# Altium PCB POGO-headers.PcbDoc
Units mil, origin at the board's own origin, x right, y up, seen from the top; angles counter-clockwise.
Board outline 2179.49 x 1970 mil, 4 copper layers (Top Layer, Mid-Layer 1, Mid-Layer 2, Bottom Layer); 5 components, 38 nets, 80 pads, 37 vias.
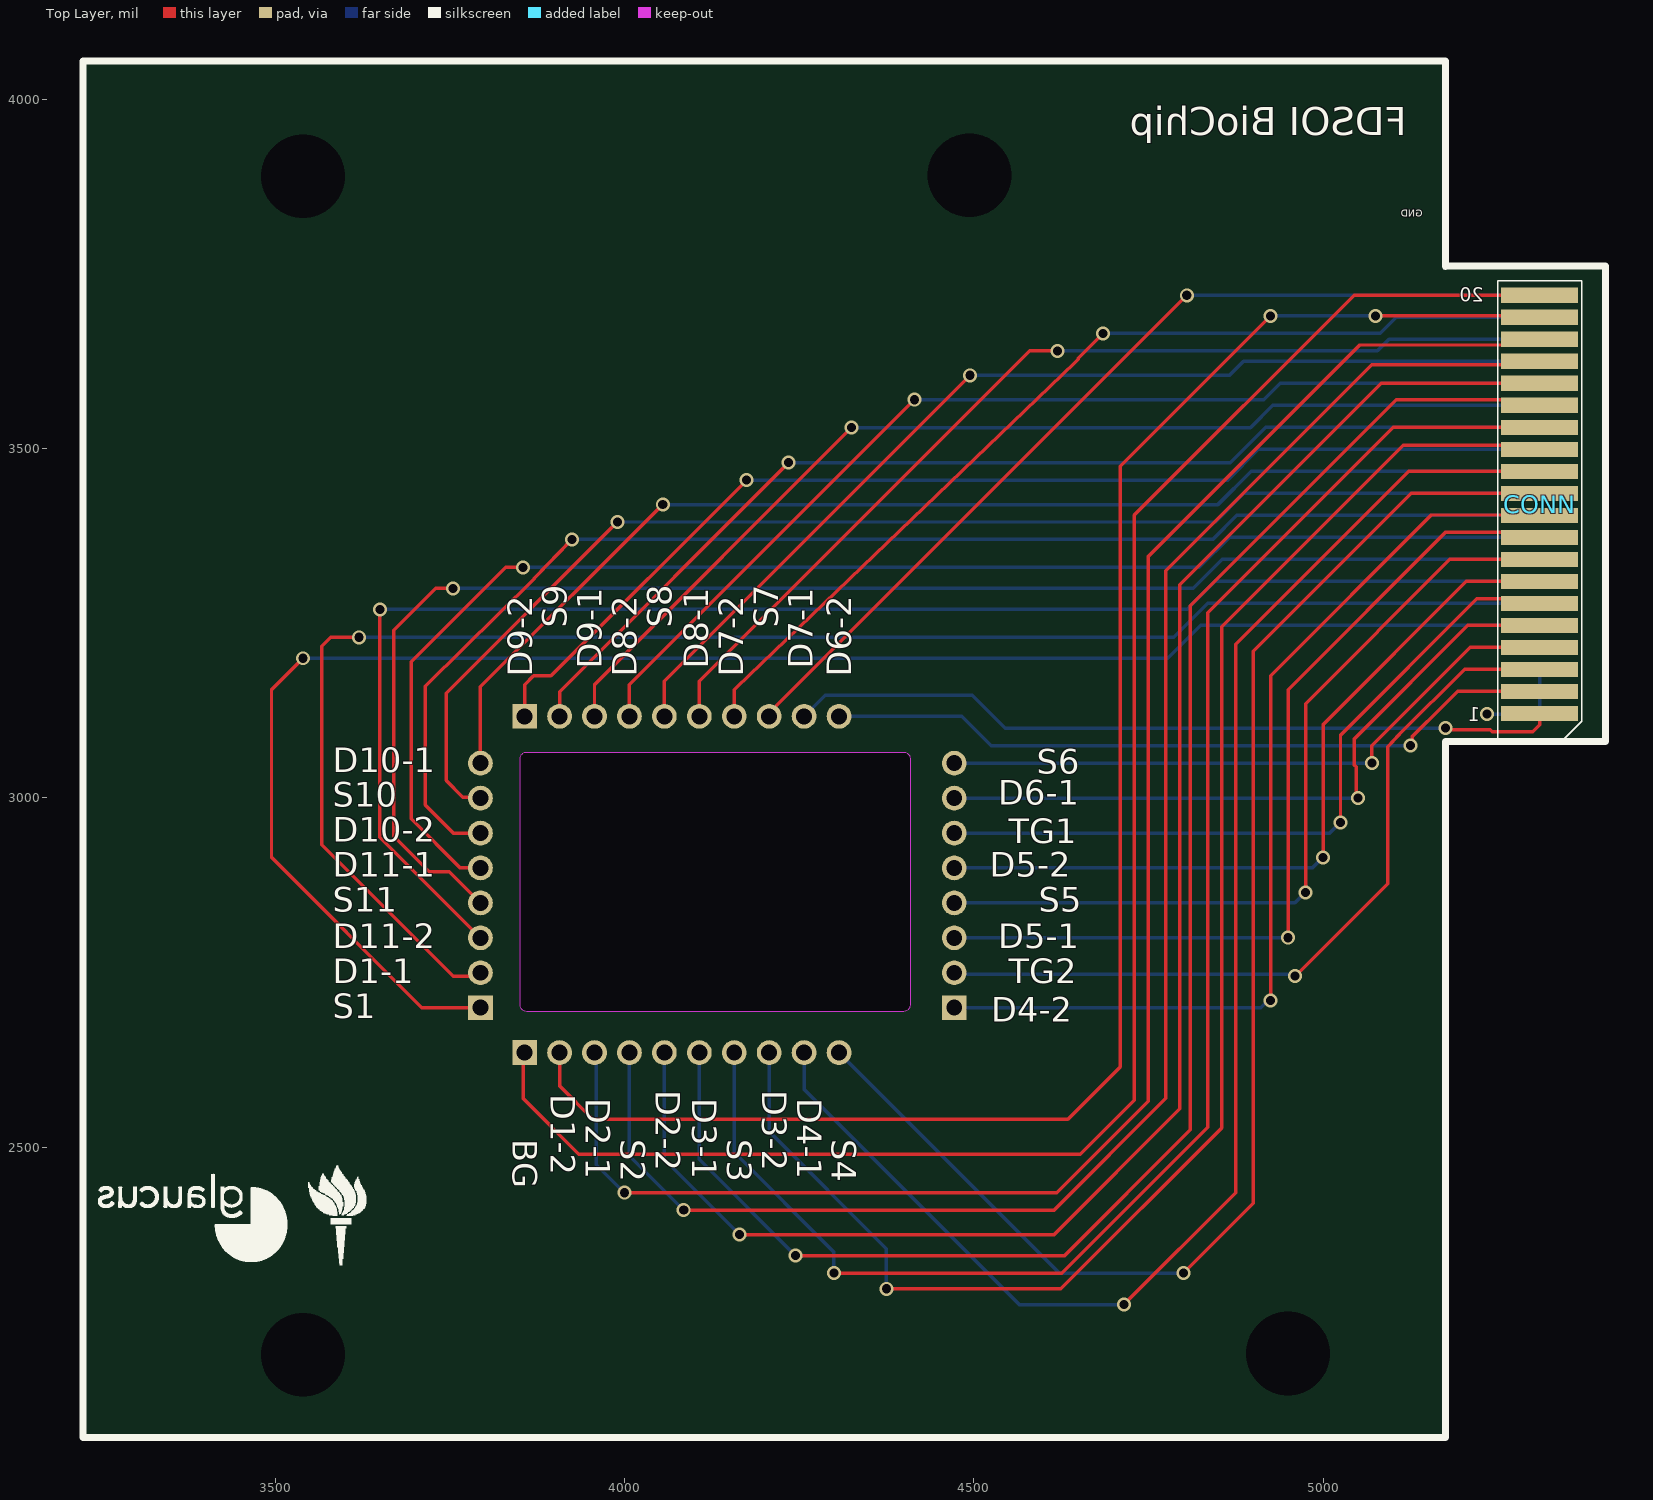
[diagram p0: Top Layer view]
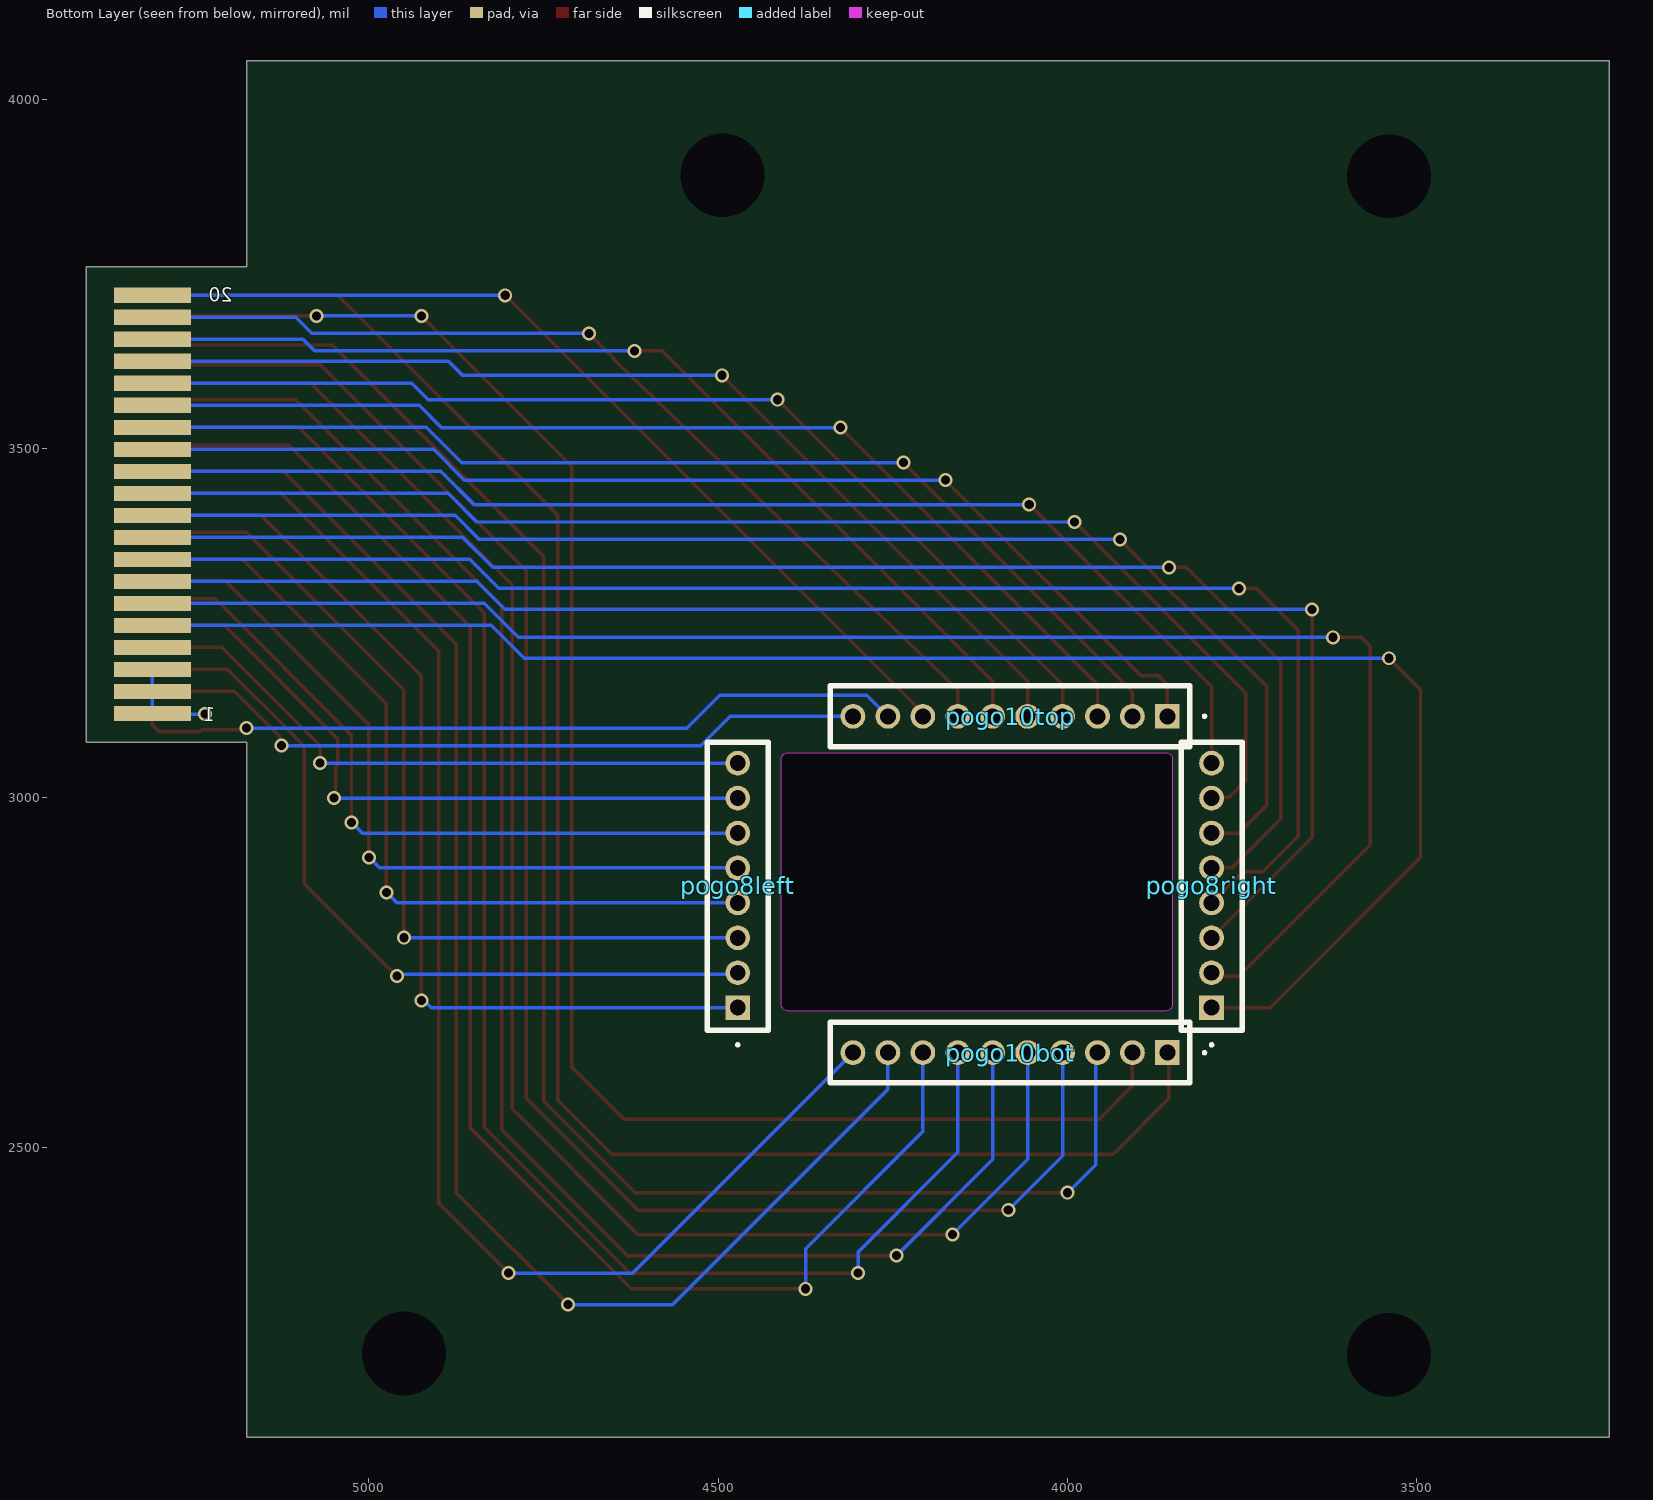
[diagram p1: Bottom Layer view, seen from below]
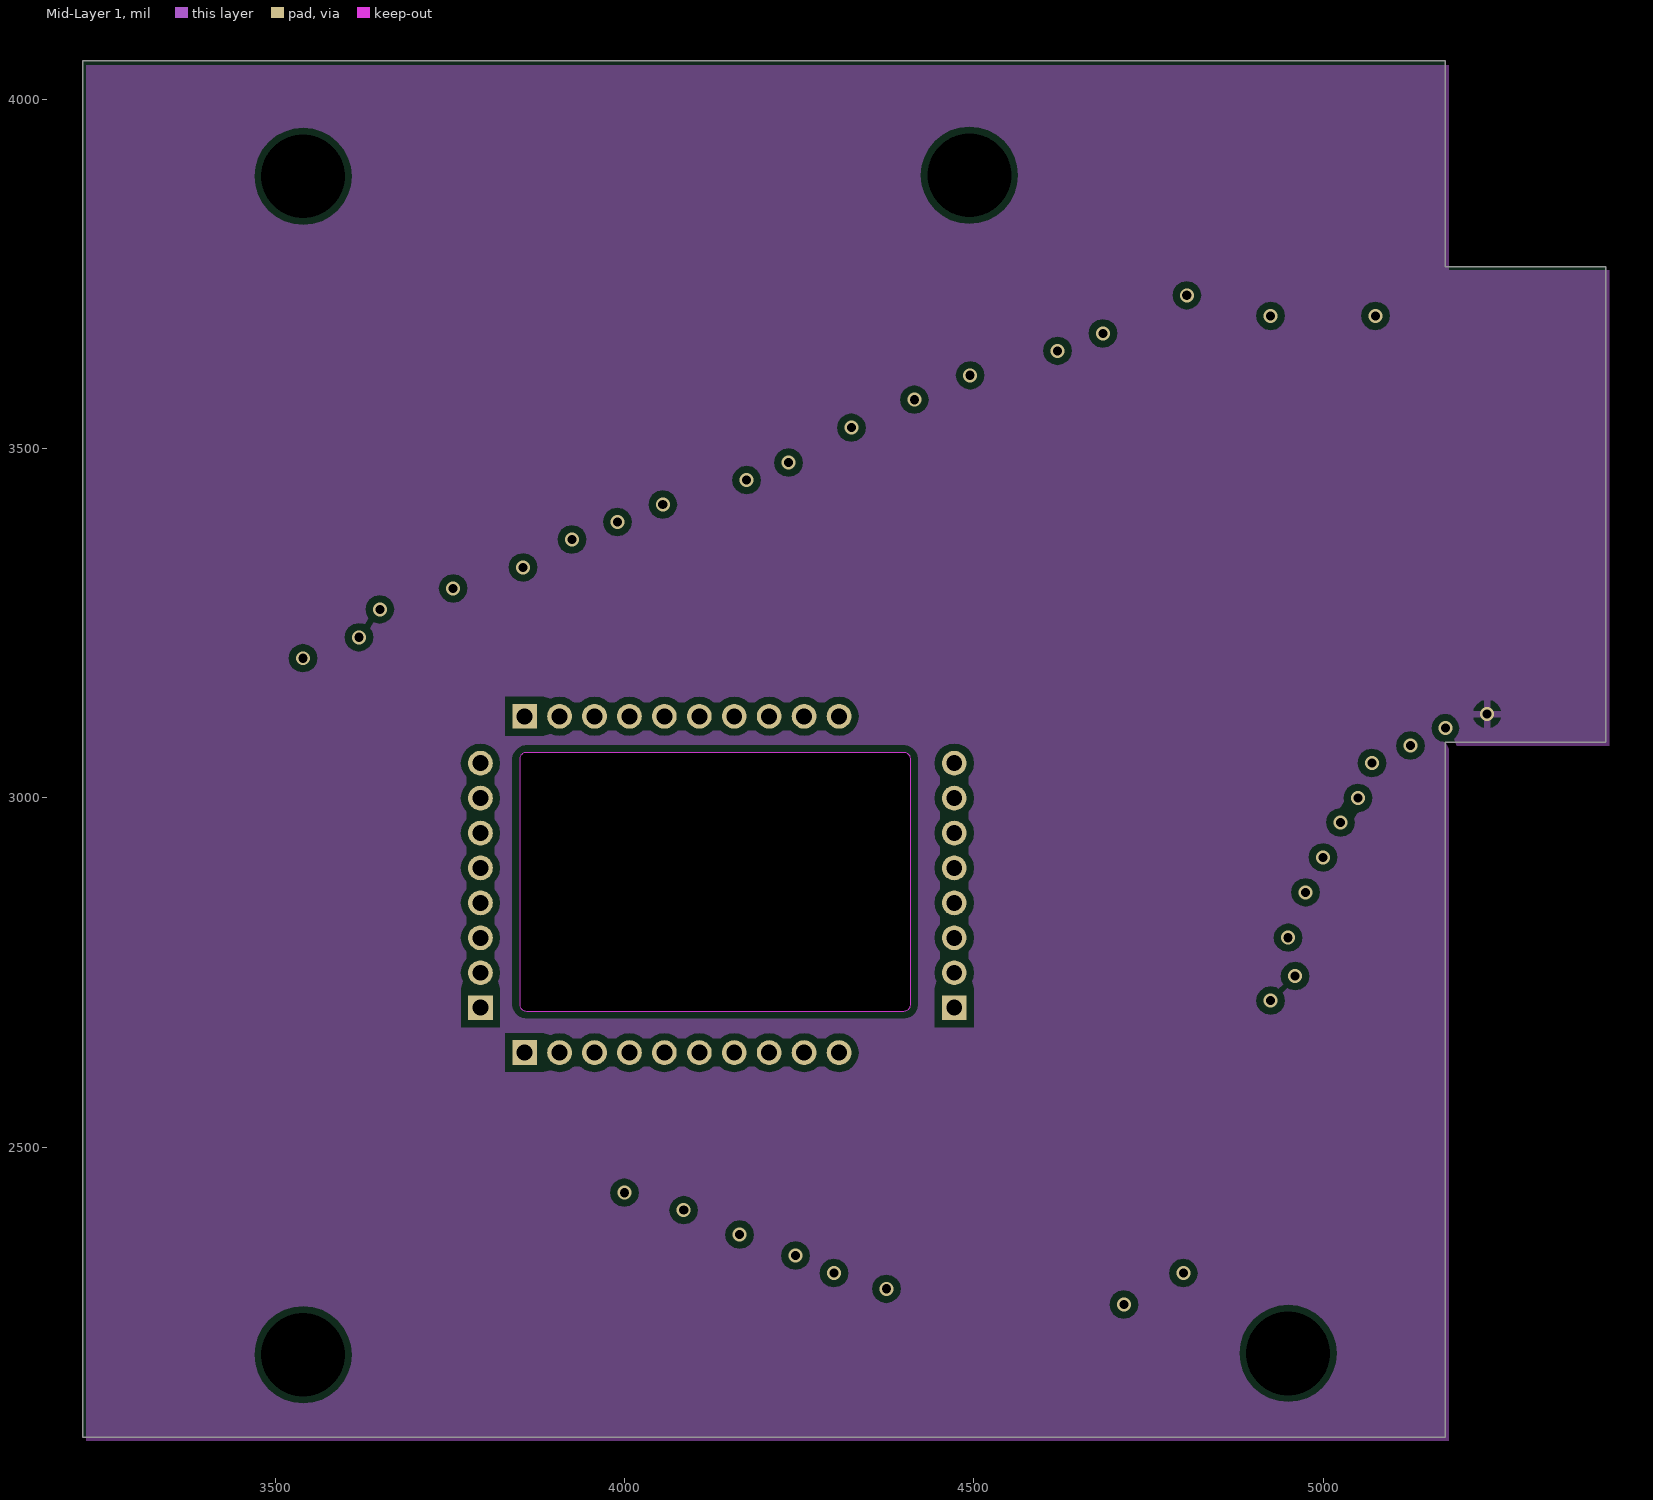
[diagram p2: Mid-Layer 1]
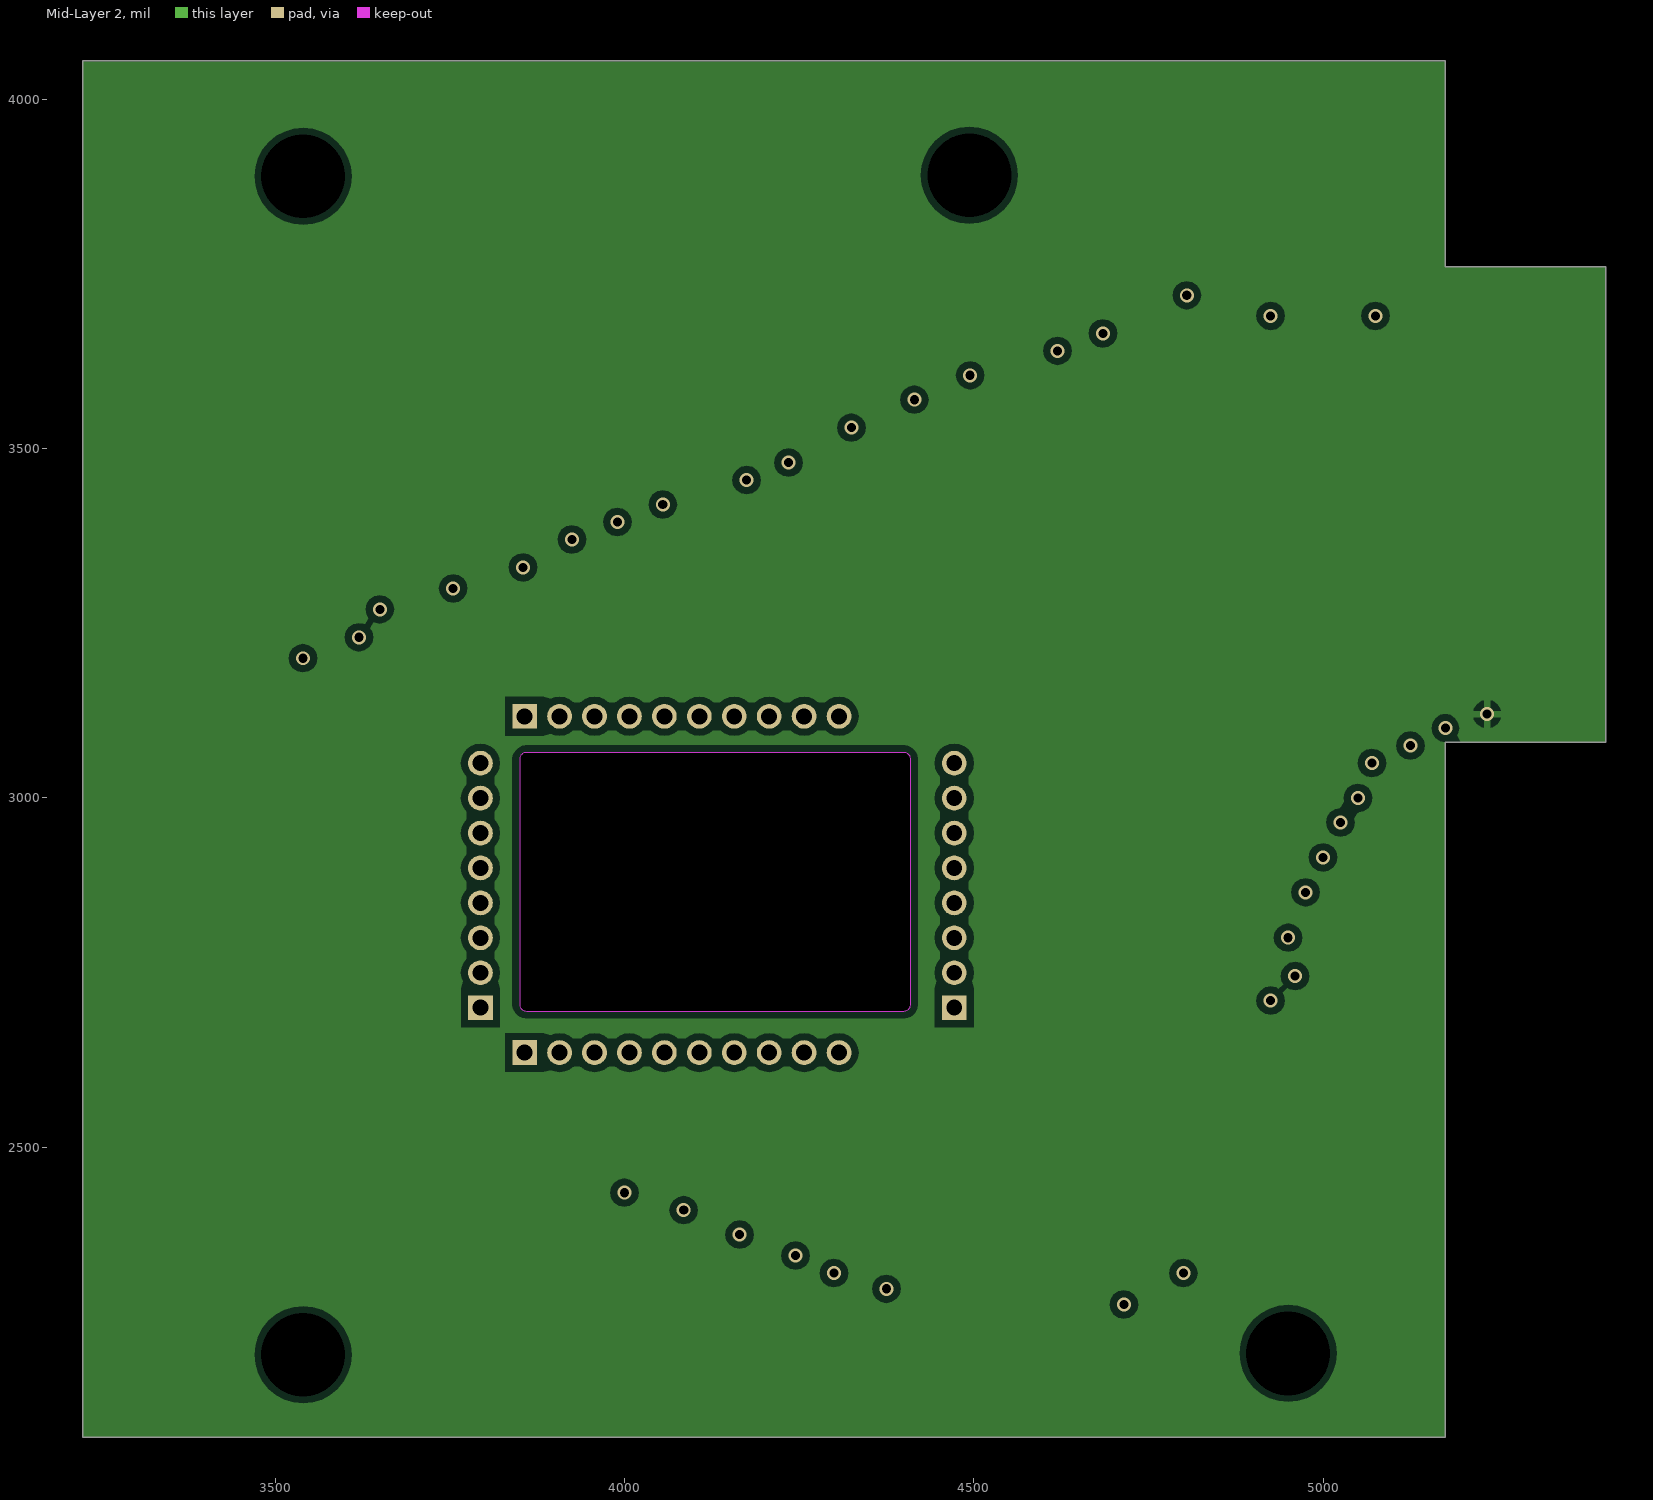
[diagram p3: Mid-Layer 2]
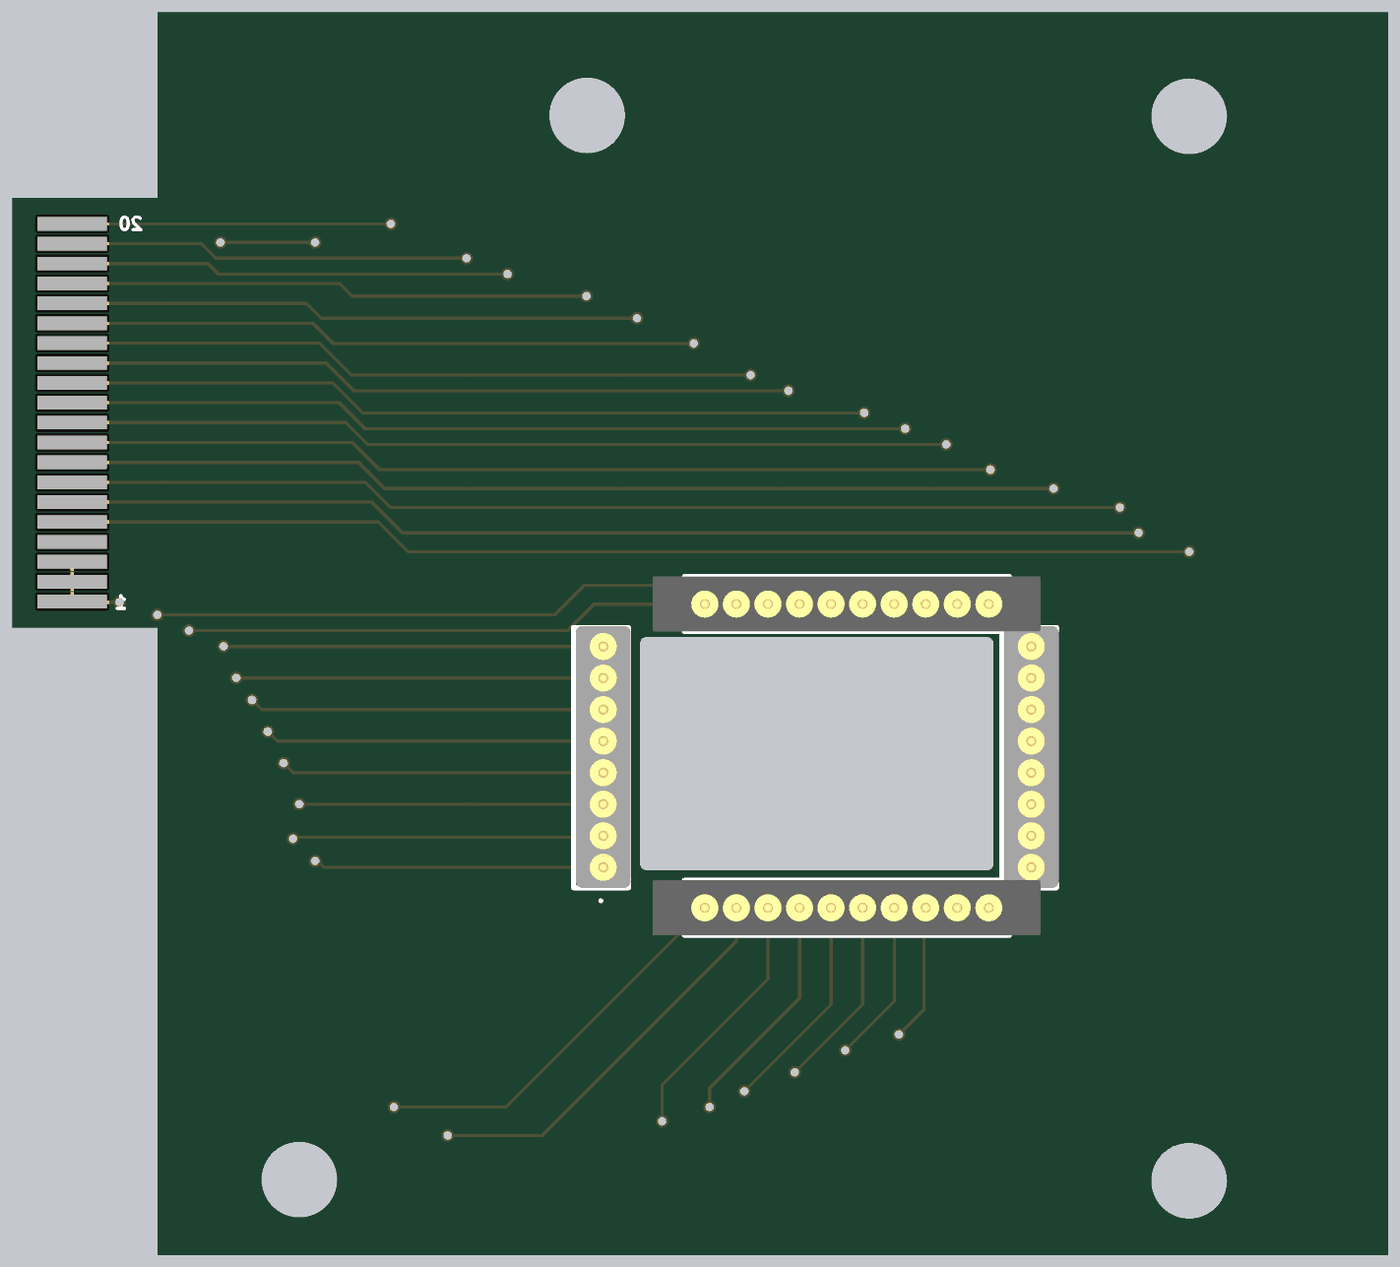
[diagram p4: 3D render of the assembled board from below, using the file's embedded part models]

## Layer stack, top to bottom
Top Solder: solder mask 0.4, Solder Resist, Dk 3.5
Top Layer: signal copper 1.4
Dielectric 1: dielectric 12.6, FR-4, Dk 4.8
Mid-Layer 1: signal copper 1.4
Dielectric2: dielectric 12.6, FR-4, Dk 4.8
Mid-Layer 2: signal copper 1.4
Dielectric3: dielectric 12.6, FR-4, Dk 4.8
Bottom Layer: signal copper 1.4
Bottom Solder: solder mask 0.4, Solder Resist, Dk 3.5

## Board outline
5404.49,3079.65 5404.49,3760.35 5175,3760.35 5175,4055 3225,4055 3225,2085 5175,2085 5175,3079.65
cut-out: 4410,2705 4410,3055 ccw(c4400,3055) 4400,3065 3860,3065 ccw(c3860,3055) 3850,3055 3850,2705 ccw(c3860,2705) 3860,2695 4400,2695 ccw(c4400,2705)

## Design rules (kind name [scope] priority, off if disabled: settings)
Clearance Clearance_1 [(ExistsOnLayer('Mid-Layer 1') Or ExistsOnLayer('Mid-Layer 2')) vs (ExistsOnLayer('Mid-Layer 1') Or ExistsOnLayer('Mid-Layer 2'))] p1: gap=10 ignorepadtopadclearanceinfootprint=FALSE
Clearance Clearance_2 [(ExistsOnLayer('Top Layer') Or ExistsOnLayer('Bottom Layer')) vs (ExistsOnLayer('Top Layer') Or ExistsOnLayer('Bottom Layer'))] p2: gap=10 ignorepadtopadclearanceinfootprint=TRUE
Clearance [All] p3: gap=9 ignorepadtopadclearanceinfootprint=FALSE
HoleSize [All] p1: absolutevalues=TRUE maxlimit=130 minlimit=1 maxpercent=80.000 minpercent=20.000
MinimumSolderMaskSliver [All] p1: minsoldermaskwidth=1.5
PolygonConnect [All] p1: connectstyle=Relief reliefconductorwidth=10 reliefentries=4 polygonreliefangle="90 Angle" airgapwidth=10
RoutingVias [All] p1: holewidth=28 width=50 viastyle="Through Hole" minholewidth=28 minwidth=50 maxholewidth=28 maxwidth=50
SilkToSilkClearance [All] p1: silktosilkclearance=1
SilkToSolderMaskClearance [IsPad] p1: minsilkscreentomaskgap=1.5 clearancetoexposedcopper=TRUE
SolderMaskExpansion [All] p1: expansion=4 istentingtop=FALSE
SupplyNets "Schematic Supply Nets" [InNet('GND')] p1: voltage=0.000
Width [All] p1: maxlimit=10 minlimit=4.96 preferedwidth=10 toplayer_maxwidth=4.96 toplayer_prefwidth=4.96 midlayer1_minwidth=10 midlayer2_minwidth=10 bottomlayer_maxwidth=4.96 bottomlayer_prefwidth=4.96 minimp=50.000000 maximp=50.000000 favimp=50.000000
26 further rules are at their usual default settings.

## Components (designator, comment, footprint, x,y, rotation, side; value= is the part's Value field where it differs from the comment)
CONN "40pin_edgeconn" "Edge Connector" 5310,3121.06 r90 top
pogo8left "Pogo_8pin" "New footprint 1" 4466.91,2919.84 r90 bottom
pogo8right "Pogo_8pin" "New footprint 1" 3788.76,2919.84 r90 bottom
pogo10bot "854-22-010-10-004101" 8542201010004101 3857.28,2635.55 r0 bottom
pogo10top "854-22-010-10-004101" 8542201010004101 3857.28,3116.85 r0 bottom

## Footprints (in the part's own frame and the unit in brackets; to place one, negate y for a bottom-side part, rotate by r counter-clockwise, add the part's x,y. Pads: shape width x height; smd on the part's side, far side on the other; paste and mask are expansions set on the pad)
8542201010004101 [mm]
  rect 0.9x0.9 hole 0.58: 1(0,0)
  round 0.9 hole 0.58: 2(1.27,0) 3(2.54,0) 4(3.81,0) 5(5.08,0) 6(6.35,0) 7(7.62,0) 8(8.89,0) 9(10.16,0) 10(11.43,0)
  silkscreen extent -1.4,-1.11 12.26,1.1, body extent -2.09,-1.11 13.53,1.1, height 13.01
"Edge Connector" [mm]
  rect 0.55x2.8 smd: A1(15.2,0) A2(14.4,0) A3(13.6,0) A4(12.8,0) A5(12,0) A6(11.2,0) A7(10.4,0) A8(9.6,0) A9(8.8,0) A10(8,0) A11(7.2,0) A12(6.4,0) A13(5.6,0) A14(4.8,0) A15(4,0) A16(3.2,0) A17(2.4,0) A18(1.6,0) A19(0.8,0) A20(0,0)
  rect 0.55x2.8 smd far side: B1(15.2,0) B2(14.4,0) B3(13.6,0) B4(12.8,0) B5(12,0) B6(11.2,0) B7(10.4,0) B8(9.6,0) B9(8.8,0) B10(8,0) B11(7.2,0) B12(6.4,0) B13(5.6,0) B14(4.8,0) B15(4,0) B16(3.2,0) B17(2.4,0) B18(1.6,0) B19(0.8,0) B20(0,0)
  silkscreen extent -1.02,-2.4 16.26,3.43
"New footprint 1" [mm]
  rect 0.9x0.9 hole 0.58: 1(-5.588,0.134)
  round 0.9 hole 0.58: 2(-4.318,0.134) 3(-3.048,0.134) 4(-1.778,0.134) 5(-0.508,0.134) 6(0.762,0.134) 7(2.032,0.134) 8(3.302,0.134)
  silkscreen extent -6.99,-0.98 4.06,1.23, body extent -6.41,-1.07 4.13,1.14, height 8.65

## Part data
CONN: library part CMP-002-00082-6
pogo8left pogo8right: library part CMP-002-00071-1, "8-pin pogo pin"
pogo10bot pogo10top: "Connector", Manufacturer_Name=Mill-Max, Mouser Part Number=575-8542201010004101, Datasheet Link=https://www.mill-max.com/products/spring-loaded/pogo-pin-header-strip/854/10-004101/854-22-010-10-004101?s_term=854-22-010-10-004101&s_type=Quick/Product/Part%20Number%20Search, Height=4.35mm, Manufacturer_Part_Number=854-22-010-10-004101, Mouser Price/Stock=https://www.mouser.co.uk/ProductDetail/Mill-Max/854-22-010-10-004101?qs=t7xnP681wgUW5migVjrAuw%3D%3D

## Free pads (board coordinates)
  round 0 hole 120.08 unplated: 5(3540.16,3889.8) 5(4493.9,3891.3) c(3540.16,2203.11) c(4950,2205)

## Via types
v1: diameter 20, hole 13, Top Layer to Bottom Layer, tented both sides, 37 vias

## Nets (pads, with @x,y where several pads share a name; then routed paths per layer and width w, separated by ;. In a path a pad name is that pad's centre, name@x,y a point inside that pad or via, vN(x,y) a via of type N, cw(c..) or ccw(c..) an arc to the next point about the centre after c; other vN are vias at no path point)
BG: CONN.A1 pogo10bot.1 | length 2554.6
  Top Layer w4.96: pogo10bot.1 3855,2633.27 3855,2570 3935,2490 4652.69,2490 4730,2567.31 4730,3405 5044.49,3719.49 CONN.A1
D1-1: CONN.B15 pogo8right.2 | length 2359.4
  Top Layer w4.96: v1(3620,3230) 3580,3230 3567.05,3217.05 3567.05,2932.95 3755,2745 3789.2,2745 pogo8right.2
  Bottom Layer w4.96: v1(3620,3230) 4786.57,3230 4835.12,3278.54 CONN.B15
D1-2: CONN.A2 pogo10bot.2 | length 2451.3
  Top Layer w4.96: pogo10bot.2 3907.28,2587.72 3955,2540 4635,2540 4710,2615 4710,3475 v1(4925,3690) ; v1(5075,3690) 5307.99,3690 CONN.A2
  Bottom Layer w4.96: v1(4925,3690) v1(5075,3690)
D2-1: CONN.A3 pogo10bot.3 | length 2490.8
  Top Layer w4.96: v1(4000,2435) 4618.84,2435 4750,2566.16 4750,3345.69 5052.62,3648.31 5301.81,3648.31 CONN.A3
  Bottom Layer w4.96: pogo10bot.3 3960,2632.83 3960,2475 v1(4000,2435)
D2-2: CONN.A5 pogo10bot.5 | length 2394.2
  Top Layer w4.96: v1(4165,2375) 4615,2375 4795.04,2555.04 4795.04,3305.04 5083.5,3593.5 CONN.A5
  Bottom Layer w4.96: pogo10bot.5 4057.28,2482.72 v1(4165,2375)
D3-1: CONN.A6 pogo10bot.6 | length 2362.7
  Top Layer w4.96: v1(4245,2345) 4630,2345 4810,2525 4810,3275 5105,3570 5302.01,3570 CONN.A6
  Bottom Layer w4.96: pogo10bot.6 4107.28,2482.72 v1(4245,2345)
D3-2: CONN.A8 pogo10bot.8 | length 2265.5
  Top Layer w4.96: v1(4375,2297.52) 4624.83,2297.52 4855,2527.69 4855,3245 5115,3505 5304.02,3505 CONN.A8
  Bottom Layer w4.96: pogo10bot.8 4207.28,2527.28 4207.05,2527.05 4207.05,2522.95 4375,2355 v1(4375,2297.52)
D4-1: CONN.A9 pogo10bot.9 | length 2186.8
  Top Layer w4.96: v1(4715,2275) 4875,2435 4875,3220 5122.52,3467.52 CONN.A9
  Bottom Layer w4.96: pogo10bot.9 4257.28,2582.72 4565,2275 v1(4715,2275)
D4-2: CONN.A11 pogo8left.1 | length 1402.5
  Top Layer w4.96: v1(4925,2710) 4925,3175 5155,3405 5309.53,3405 CONN.A11
  Bottom Layer w4.96: pogo8left.1 4910.77,2699.84 4920.93,2710 v1(4925,2710)
D5-1: CONN.A12 pogo8left.3 | length 1289
  Top Layer w4.96: v1(4950,2800) 4950,3155 5175,3380 5303.03,3380 CONN.A12
  Bottom Layer w4.96: pogo8left.3 4472.27,2799.92 4949.92,2799.92 v1(4950,2800)
D5-2: CONN.A14 pogo8left.5 | length 1119
  Top Layer w4.96: v1(5000,2915) 5000,3105 5205.04,3310.04 CONN.A14
  Bottom Layer w4.96: pogo8left.5 4984.84,2899.84 v1(5000,2915)
D6-1: CONN.A16 pogo8left.7 | length 997.1
  Top Layer w4.96: v1(5050,3000) 5047.52,3002.48 5047.52,3044.52 5045,3047.03 5045,3085 5207.05,3247.05 CONN.A16
  Bottom Layer w4.96: pogo8left.7 4472.27,2999.92 5049.92,2999.92 v1(5050,3000)
D6-2: CONN.A19 pogo10top.10 | length 1058
  Top Layer w4.96: v1(5125,3075) 5127.37,3077.37 5127.37,3087.37 5173.61,3133.61 5175,3135 5192.56,3152.56 CONN.A19
  Bottom Layer w4.96: pogo10top.10 4483.15,3116.85 4525,3075 v1(5125,3075)
D7-1: CONN.A20 pogo10top.9 | length 1107
  Top Layer w4.96: v1(5175,3100) 5177.48,3097.52 5239.52,3097.52 5242.03,3095 5300,3095 5310,3105 CONN.A20
  Bottom Layer w4.96: pogo10top.9 4287.48,3147.05 4497.95,3147.05 4545,3100 v1(5175,3100)
D7-2: CONN.B2 pogo10top.7 | length 1407.1
  Top Layer w4.96: pogo10top.7 4157.28,3152.75 4157.28,3154.8 4160.19,3157.71 4645.57,3623.78 ; 4645.58,3623.78 4645.9,3624.1 4649.75,3627.95 4649.75,3629.26 4685,3664.51 v1(4685,3665)
  Bottom Layer w4.96: v1(4685,3665) 5081.79,3665 5104.78,3687.99 CONN.B2
D8-1: CONN.B3 pogo10top.6 | length 1456
  Top Layer w4.96: pogo10top.6 4107.28,3148.88 4107.05,3149.11 4107.05,3167.05 4580,3640 v1(4620,3640)
  Bottom Layer w4.96: v1(4620,3640) 5077.95,3640 5094.45,3656.5 CONN.B3
D8-2: CONN.B5 pogo10top.4 | length 1526.8
  Top Layer w4.96: pogo10top.4 4007.28,3162.28 v1(4415,3570)
  Bottom Layer w4.96: v1(4415,3570) 4915,3570 4938.5,3593.5 CONN.B5
D9-1: CONN.B6 pogo10top.3 | length 1563.7
  Top Layer w4.96: pogo10top.3 3957.28,3162.28 v1(4325,3530)
  Bottom Layer w4.96: v1(4325,3530) 4896.16,3530 4928.17,3562.01 CONN.B6
D9-2: CONN.B8 pogo10top.1 | length 1637.6
  Top Layer w4.96: pogo10top.1 3857.28,3162.28 3870,3175 3895,3175 v1(4175,3455)
  Bottom Layer w4.96: v1(4175,3455) 4863.47,3455 4907.49,3499.02 CONN.B8
D10-1: CONN.B9 pogo8right.8 | length 1752.9
  Top Layer w4.96: pogo8right.8 3794.03,3159.03 v1(4055,3420)
  Bottom Layer w4.96: v1(4055,3420) 4849.63,3420 4897.15,3467.52 CONN.B9
D10-2: CONN.B11 pogo8right.6 | length 1962
  Top Layer w4.96: pogo8right.6 3755.16,2949.84 3715,2990 3715,3157.95 3715,3160 3717.91,3162.91 3870.8,3314.01 ccw(c3855,3330) 3871.15,3314.37 v1(3925,3370)
  Bottom Layer w4.96: v1(3925,3370) 4841.94,3370 4876.47,3404.53 CONN.B11
D11-1: CONN.B12 pogo8right.5 | length 2041.8
  Top Layer w4.96: pogo8right.5 3765.16,2899.84 3695,2970 3695,3195 3830,3330 v1(3855,3330)
  Bottom Layer w4.96: v1(3855,3330) 4823.1,3330 4866.13,3373.03 CONN.B12
D11-2: CONN.B14 pogo8right.3 | length 2206.4
  Top Layer w4.96: v1(3650,3270) 3650,2943.87 pogo8right.3
  Bottom Layer w4.96: v1(3650,3270) 4805.42,3270 4845.46,3310.04 CONN.B14
GND: CONN.B18 CONN.B19 CONN.B20 | length 138.6
  Bottom Layer w4.96: v1(5234.88,3120) 5308.94,3120 CONN.B20 CONN.B19 CONN.B18
S1: CONN.B16 pogo8right.1 | length 2481.3
  Top Layer w4.96: v1(3540,3200) 3495,3155 3495,2915 3710.16,2699.84 pogo8right.1
  Bottom Layer w4.96: v1(3540,3200) 4777.73,3200 4824.78,3247.05 CONN.B16
S2: CONN.A4 pogo10bot.4 | length 2428.3
  Top Layer w4.96: v1(4085,2410) 4615,2410 4775,2570 4775,3325 5070,3620 5305,3620 CONN.A4
  Bottom Layer w4.96: pogo10bot.4 4007.28,2487.72 v1(4085,2410)
S3: CONN.A7 pogo10bot.7 | length 2317.3
  Top Layer w4.96: v1(4300,2320) 4626.16,2320 4835,2528.84 4835,3265 5100.51,3530.51 CONN.A7
  Bottom Layer w4.96: pogo10bot.7 4157.28,2492.72 4300,2350 v1(4300,2320)
S4: CONN.A10 pogo10bot.10 | length 2058.5
  Top Layer w4.96: v1(4800,2320) 4900,2420 4900,3210 5126.02,3436.02 CONN.A10
  Bottom Layer w4.96: pogo10bot.10 4622.83,2320 v1(4800,2320)
S5: CONN.A13 pogo8left.4 | length 1199.6
  Top Layer w4.96: v1(4975,2865) 4975,3135 5181.54,3341.54 CONN.A13
  Bottom Layer w4.96: pogo8left.4 4959.84,2849.84 v1(4975,2865)
S6: CONN.A17 pogo8left.8 | length 921.1
  Top Layer w4.96: v1(5070,3050) 5070,3075 5210.55,3215.55 CONN.A17
  Bottom Layer w4.96: pogo8left.8 5069.84,3049.84 v1(5070,3050)
S7: CONN.B1 pogo10top.8 | length 1359.1
  Top Layer w4.96: pogo10top.8 4207.28,3121.77 v1(4805,3719.49)
  Bottom Layer w4.96: pogo10top.8 pogo10top.8@4210,3119.57 ; v1(4805,3719.49) CONN.B1
S8: CONN.B4 pogo10top.5 | length 1492.7
  Top Layer w4.96: pogo10top.5 4057.28,3167.28 v1(4495,3605)
  Bottom Layer w4.96: v1(4495,3605) 4866.18,3605 4886.18,3625 CONN.B4
S9: CONN.B7 pogo10top.2 | length 1594.8
  Top Layer w4.96: pogo10top.2 3907.28,3152.28 v1(4235,3480)
  Bottom Layer w4.96: v1(4235,3480) 4867.31,3480 4917.83,3530.51 CONN.B7
S10: CONN.B10 pogo8right.7 | length 1867.9
  Top Layer w4.96: pogo8right.7 3792.75,3001.12 3768.88,3001.12 3745,3025 3745,3150 v1(3990,3395)
  Bottom Layer w4.96: v1(3990,3395) 4845.79,3395 4886.81,3436.02 CONN.B10
S11: CONN.B13 pogo8right.4 | length 2140.5
  Top Layer w4.96: v1(3755,3300) 3730,3300 3670,3240 3670,2945.03 3720.74,2894.29 3749.56,2894.29 pogo8right.4
  Bottom Layer w4.96: v1(3755,3300) 4814.26,3300 4855.79,3341.54 CONN.B13
SOL-G: CONN.B17
TG4: CONN.A15 pogo8left.6 | length 1052.5
  Top Layer w4.96: v1(5025,2965) 5025,3090 5220,3285 5303.54,3285 CONN.A15
  Bottom Layer w4.96: pogo8left.6 5009.84,2949.84 v1(5025,2965)
TG6: CONN.A18 pogo8left.2 | length 1136.6
  Top Layer w4.96: v1(4960,2745) 5092.48,2877.48 5092.48,3071.58 5092.48,3073.64 5108.77,3090.56 cw(c5125,3075) 5109.16,3090.95 5202.9,3184.05 CONN.A18
  Bottom Layer w4.96: pogo8left.2 4474.6,2747.42 4957.58,2747.42 v1(4960,2745)

## Polygon pours and split planes (outlines as drawn)
GND on Mid-Layer 1 "Mid-Layer 1-No Net" (solid, pour order 3): 5180,2080 3230,2080 3230,4048.74 5180,4048.74 5180,3755.35 5409.49,3755.35 5409.49,3074.65 5180,3074.65
GND on Mid-Layer 2 "Mid-Layer 2-No Net" (solid, pour order 5): 5175,2085 3225,2085 3225,4053.74 5175,4053.74 5175,3760.35 5404.49,3760.35 5404.49,3079.65 5175,3079.65

## Silkscreen, mask and mechanical layers (free items; w line width, h text height)
Top Overlay:
  drawing of 26 lines, arcs and shapes, not listed
  text "FDSOI BioChip" at 5120,3948.33 h40
  text "GND" at 5143,3832 h10
  text "20" at 5230,3710 h20
  text "S9" at 3917.84,3243.31 h35 r90
  text "S8" at 4067.84,3243.31 h35 r90
  text "S7" at 4220,3243.31 h35 r90
  text "D9-1" at 3967.84,3185 h35 r90
  text "D8-1" at 4120,3185 h35 r90
  text "D7-1" at 4270,3185 h35 r90
  text "D9-2" at 3867.84,3173.33 h35 r90
  text "D8-2" at 4017.84,3173.33 h35 r90
  text "D7-2" at 4170,3173.33 h35 r90
  text "D6-2" at 4325,3173.33 h35 r90
  text "1" at 5225,3110 h20
  text "D10-1" at 3582.99,3037.16 h35
  text "S6" at 4590,3035 h35
  text "D6-1" at 4535,2990 h35
  text "S10" at 3582.99,2987.16 h35
  text "D10-2" at 3582.99,2937.16 h35
  text "TG1" at 4550,2935 h35
  text "D11-1" at 3582.99,2887.16 h35
  text "D5-2" at 4523.33,2887.16 h35
  text "S11" at 3582.99,2837.16 h35
  text "S5" at 4593.31,2837.16 h35
  text "D11-2" at 3582.99,2785 h35
  text "D5-1" at 4535,2785 h35
  text "D1-1" at 3582.99,2735 h35
  text "TG2" at 4550,2735 h35
  text "S1" at 3582.99,2685 h35
  text "D4-2" at 4525,2680 h35
  text "D2-2" at 4045,2581.65 h35 r270
  text "D3-2" at 4197.16,2581.65 h35 r270
  text "D1-2" at 3895,2575.82 h35 r270
  text "D2-1" at 3945,2569.99 h35 r270
  text "D3-1" at 4097.16,2569.99 h35 r270
  text "D4-1" at 4247.16,2569.99 h35 r270
  text "BG" at 3840,2511.68 h35 r270
  text "S2" at 3995,2511.68 h35 r270
  text "S3" at 4147.16,2511.68 h35 r270
  text "S4" at 4297.16,2511.68 h35 r270
Bottom Overlay:
  text "20" at 5195,3710 h20
  text "1" at 5220,3110 h20